# Altium PCB 主控+电源管理拼版_2021-11-10.pcbdoc
Units mm, origin at the board's own origin, x right, y up, seen from the top; angles counter-clockwise.
Board outline 122.05 x 136.4 mm, 2 copper layers (Top Layer, Bottom Layer); 31 components, 73 nets, 166 pads, 76 vias.
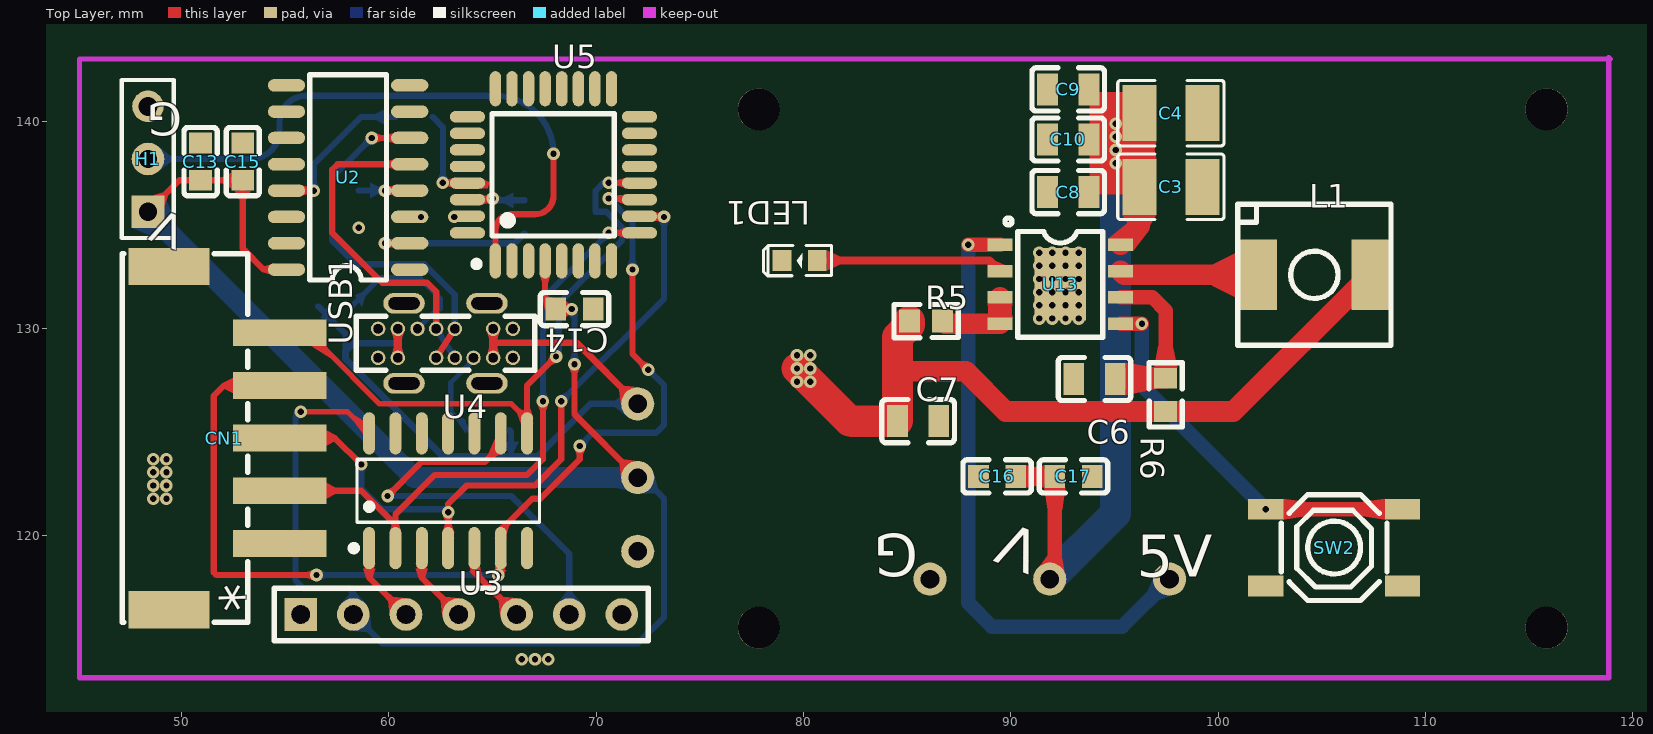
[diagram p0: Top Layer view]
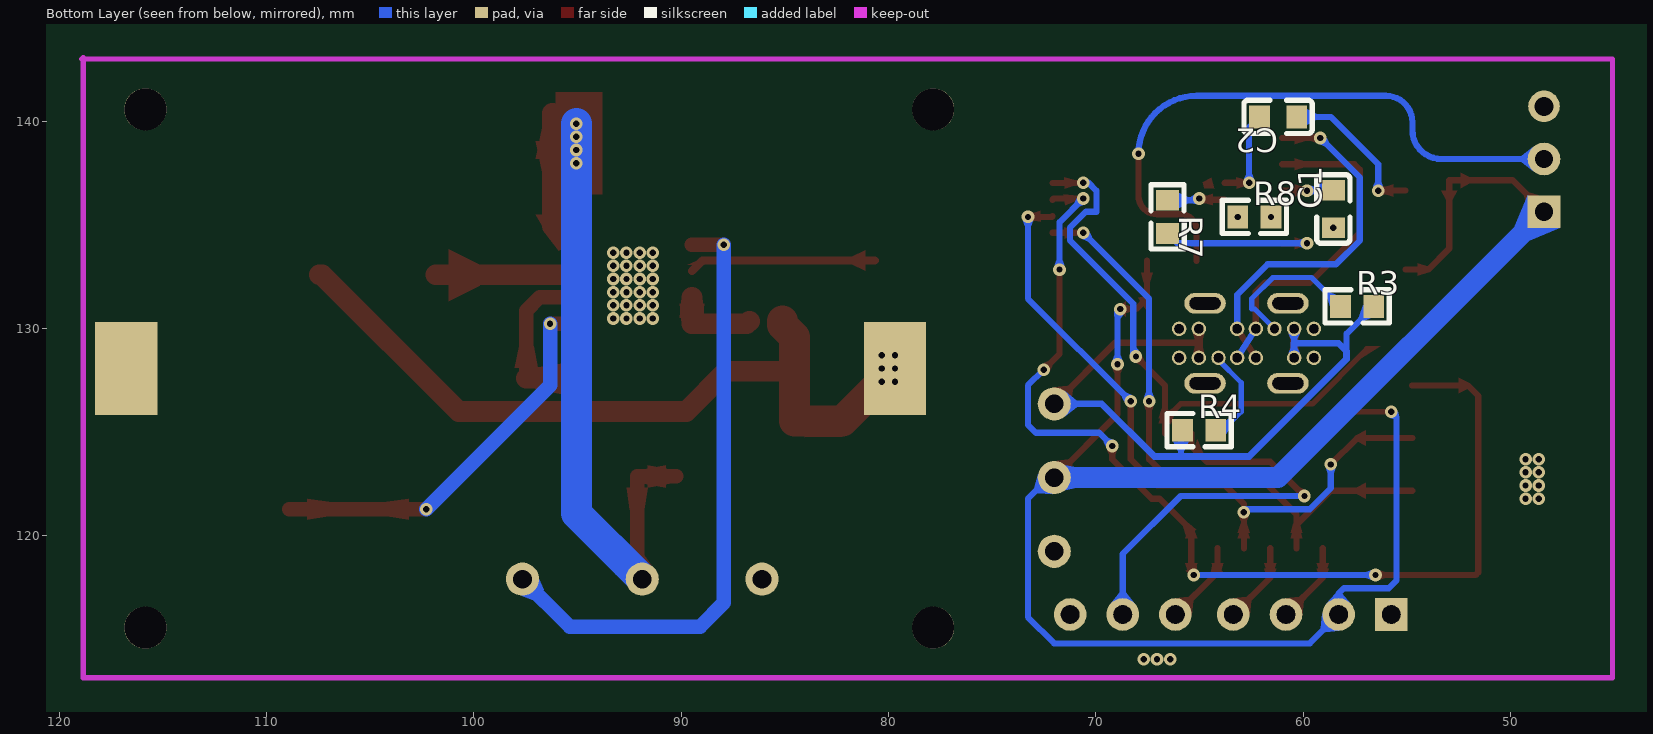
[diagram p1: Bottom Layer view, seen from below]

## Layer stack, top to bottom
Top Layer: signal copper (thickness not stored)
Dielectric: dielectric 0.32, FR-4, Dk 4.8
Bottom Layer: signal copper (thickness not stored)

## Board outline
147.447,25.4 25.4,25.4 25.4,161.798 147.447,161.798

## Components (designator, comment, footprint, x,y, rotation, side; value= is the part's Value field where it differs from the comment)
C1 "103" C0603#1 58.547,135.763 r270 bottom
C2 "0.1u" C0603#1 61.214,140.208 r180 bottom
C3 "100uF" C1210 97.727,136.833 r180 top
C4 "100uF" C1210 97.727,140.389 r180 top
C6 "22uF" C0805 94.044,127.562 r0 top
C7 "22uF" C0805 85.535,125.53 r0 top
C8 "22uF" C0805 92.774,136.579 r180 top
C9 "22uF" C0805 92.774,141.532 r180 top
C10 "22uF" C0805 92.774,139.119 r180 top
C13 "0.1u" C0603#2 50.927,138.049 r270 top
C14 "0.1u" C0603#2 68.961,130.937 r180 top
C15 "0.1u" C0603#2 52.959,138.049 r270 top
C16 "0.1u" C0603#2 89.345,122.863 r0 top
C17 "0.1u" C0603#2 93.028,122.863 r180 top
CN1 "XH2.54-5AB" CONN-SMD_5P-P2.54_XH2.54-5AB 52.07,124.714 r90 top
H1 "HDR-F-2.54_1x3" HDR-F-2.54_1X3 48.387,138.176 r90 top
L1 "1uH" IND-SMD_L7.1-W6.5-P5.60 104.648,132.588 r0 top
LED1 "LED-0603_R" LED0603_RED 79.82,133.277 r180 top
R3 "5k" R0603#1 57.405,131.064 r0 bottom
R4 "5k" R0603#1 65.025,125.095 r0 bottom
R5 "1k" R0603#2 85.916,130.356 r0 top
R6 "0.5R" R0603#2 97.473,126.8 r270 top
R7 "1k" R0603#1 66.548,135.382 r90 bottom
R8 "1k" R0603#1 62.357,135.382 r0 bottom
SW2 "TS-1187A-B-A-B" SW-SMD_4P-L5.1-W5.1-P3.70-LS6.5-TL-2 105.601,119.434 r0 top
U2 "CH340C" SOP-16_L10.0-W3.9-P1.27-LS6.0-BL 58.039,137.287 r90 top
U3 "7P排针" 7P 63.373,116.205 r0 top
U4 "CD74HC14M96" SOIC-14_L8.7-W3.9-P1.27-LS6.0-BL 62.865,122.174 r0 top
U5 "LGT8F328P" QFP-32_L7.0-W7.0-P0.80-LS9.0-BL 67.945,137.414 r0 top
U13 "IP5306" ESOP-8_L4.9-W3.9-P1.27-LS6.0-BL-EP 92.393,132.134 r270 top
USB1 "TYPE-C-31-M-15" USBC-TH_TYPE-C-31-M-15 62.738,129.286 r90 top

## Footprints (in the part's own frame and the unit in brackets; to place one, negate y for a bottom-side part, rotate by r counter-clockwise, add the part's x,y. Pads: shape width x height; smd on the part's side, far side on the other; paste and mask are expansions set on the pad)
7P [mil]
  rect 62x62 hole 35 slot 35.2 at 0 deg: 1(-300,0)
  round 62 hole 35 slot 35.2 at 0 deg: 2(-200,0) 3(-100,0) 4(0,0) 5(110,0) 6(210,0) 7(310,0)
  silkscreen extent -350,-50 360,50
C0603#1 [mm]
  rect 1x1.1 smd: 1(0.9,0) 2(-0.9,0)
  silkscreen extent -1.65,-0.8 1.65,0.8
C0603#2 [mm]
  rect 1x1.1 smd: 1(-0.9,0) 2(0.9,0)
  silkscreen extent -1.65,-0.8 1.65,0.8
C0805 [mm]
  rect 1x1.55 smd: 1(-1,0) 2(1,0)
  silkscreen extent -1.75,-1.04 1.75,1.04
C1210 [mm]
  rect 1.635x2.7 smd: 1(-1.517,0) 2(1.517,0)
  silkscreen extent -2.56,-1.58 2.56,1.58
CONN-SMD_5P-P2.54_XH2.54-5AB [mm]
  rect 1.3x4.5 smd: 1(-5.079,-2.675) 2(-2.54,-2.675) 3(0,-2.675) 4(2.54,-2.675) 5(5.08,-2.675)
  rect 1.8x3.9 smd: 6(-8.28,2.675) 7(8.28,2.675)
  silkscreen extent -8.89,-1.13 8.89,4.93
ESOP-8_L4.9-W3.9-P1.27-LS6.0-BL-EP [mm]
  rect 0.6x1.2 smd: 1(-1.905,-2.908) 2(-0.635,-2.908) 3(0.635,-2.908) 4(1.905,-2.908) 5(1.905,2.908) 6(0.635,2.908) 7(-0.635,2.908) 8(-1.905,2.908)
  rect 3.5x2.5 smd: 9(0,0)
  silkscreen extent -3.2,-2.67 2.55,2.05
HDR-F-2.54_1X3 [mil]
  rect 62x62 hole 35: 1(-100,0)
  round 62 hole 35: 2(0,0)
  round 60 hole 36: 3(100,0)
  silkscreen extent -150,-49 150,50
IND-SMD_L7.1-W6.5-P5.60 [mm]
  rect 2x3.4 smd: 1(-2.8,0) 2(2.8,0)
  silkscreen extent -3.7,-3.4 3.7,3.4
LED0603_RED [mm]
  rect 0.9x1 smd: 1(-0.85,0) 2(0.85,0)
  silkscreen extent -1.54,-0.73 1.75,0.73
QFP-32_L7.0-W7.0-P0.80-LS9.0-BL [mm]
  oval 0.55x1.7 smd: 1(-2.8,-4.15) 2(-2,-4.15) 3(-1.2,-4.15) 4(-0.4,-4.15) 5(0.4,-4.15) 6(1.2,-4.15) 7(2,-4.15) 8(2.8,-4.15) 17(2.8,4.15) 18(2,4.15) 19(1.2,4.15) 20(0.4,4.15) 21(-0.4,4.15) 22(-1.2,4.15) 23(-2,4.15) 24(-2.8,4.15)
  oval 1.7x0.55 smd: 9(4.15,-2.8) 10(4.15,-2) 11(4.15,-1.2) 12(4.15,-0.4) 13(4.15,0.4) 14(4.15,1.2) 15(4.15,2) 16(4.15,2.8) 25(-4.15,2.8) 26(-4.15,2) 27(-4.15,1.2) 28(-4.15,0.4) 29(-4.15,-0.4) 30(-4.15,-1.2) 31(-4.15,-2) 32(-4.15,-2.8)
  silkscreen extent -3.86,-4.45 2.94,2.95
R0603#1 [mm]
  rect 1x1.1 smd: 1(0.8,0) 2(-0.8,0)
  silkscreen extent -1.55,-0.81 1.55,0.8
R0603#2 [mm]
  rect 1x1.1 smd: 1(-0.8,0) 2(0.8,0)
  silkscreen extent -1.55,-0.8 1.55,0.81
SOIC-14_L8.7-W3.9-P1.27-LS6.0-BL [mm]
  oval 0.574x2.038 smd: 1(-3.81,-2.769) 2(-2.54,-2.769) 3(-1.27,-2.769) 4(0,-2.769) 5(1.27,-2.769) 6(2.54,-2.769) 7(3.81,-2.769) 8(3.81,2.769) 9(2.54,2.769) 10(1.27,2.769) 11(0,2.769) 12(-1.27,2.769) 13(-2.54,2.769) 14(-3.81,2.769)
  silkscreen extent -4.7,-2.92 4.4,1.52
SOP-16_L10.0-W3.9-P1.27-LS6.0-BL [mm]
  oval 0.6x1.8 smd: 1(-4.445,-2.972) 2(-3.175,-2.972) 3(-1.905,-2.972) 4(-0.635,-2.972) 5(0.635,-2.972) 6(1.905,-2.972) 7(3.175,-2.972) 8(4.445,-2.972) 9(4.445,2.972) 10(3.175,2.972) 11(1.905,2.972) 12(0.635,2.972) 13(-0.635,2.972) 14(-1.905,2.972) 15(-3.175,2.972) 16(-4.445,2.972)
  silkscreen extent -4.95,-1.85 4.95,1.85
SW-SMD_4P-L5.1-W5.1-P3.70-LS6.5-TL-2 [mm]
  rect 1.7x1 smd: 1(-3.3,1.849) 2(3.3,1.85) 3(-3.3,-1.85) 4(3.3,-1.85)
  silkscreen extent -2.55,-2.55 2.55,2.55
USBC-TH_TYPE-C-31-M-15 [mm]
  round 0.7 hole 0.45 slot 0.455 at 0 deg: 1(0.7,3.25) 2(0.7,2.3) 4(0.7,0.45) 5(0.7,-0.45) 7(0.7,-2.3) 8(0.7,-3.25) 9(-0.7,-3.25) 10(-0.7,-2.3) 11(-0.7,-1.35) 12(-0.7,-0.45) 13(-0.7,0.45) 15(-0.7,2.3) 16(-0.7,3.25)
  round 0.7 hole 0.45: 3(0.7,1.35)
  oval 1x2 hole 0.6 slot 1.5 at 90 deg: 17(-1.93,-2) 17(-1.93,2) 17(1.93,-2) 17(1.93,2)
  silkscreen extent -1.3,-4.3 1.3,4.3

## Free pads (board coordinates)
  round 1.6 hole 0.9: 1(72.009,119.253) 1(72.009,122.809) 1(72.009,126.365) 1(86.107,117.91) 1(91.885,117.91) 1(97.664,117.91)
  rect 3x4.5 smd far side: 1(116.777,128.07) 2(79.693,128.07)
  round 2.032 hole 2.032 unplated: ""(77.851,115.57) ""(77.851,140.57) ""(115.851,115.57) ""(115.851,140.57)

## Via types
v1: diameter 0.61, hole 0.305, Top Layer to Bottom Layer, 76 vias

## Nets (pads, with @x,y where several pads share a name; then routed paths per layer and width w, separated by ;. In a path a pad name is that pad's centre, name@x,y a point inside that pad or via, vN(x,y) a via of type N, cw(c..) or ccw(c..) an arc to the next point about the centre after c; other vN are vias at no path point)
+5V: pad.1@72.009,126.365 pad.1@97.664,117.91 R3.2 R4.1 U13.1 USB1.2 USB1.7 USB1.10 USB1.15 | length 67.4
  Top Layer w0.32: 65.038,129.317 69.057,129.317 pad.1@72.009,126.365
  Top Layer w0.4: USB1.15 USB1.2 ; USB1.10 USB1.7
  Top Layer w0.7: v1(87.948,134.039) U13.1
  Bottom Layer w0.3: R3.2 57.912,129.756 57.912,128.732 ; R4.1 65.893,125.026 65.893,123.825
  Bottom Layer w0.32: USB1.15 60.452,129.286 58.293,129.286 57.912,128.905 57.912,128.524 62.611,123.825 67.183,123.825 69.723,126.365 pad.1@72.009,126.365 ; USB1.15 USB1.2
  Bottom Layer w0.7: v1(87.948,134.039) 87.948,116.767 89.091,115.624 95.378,115.624 pad.1@97.664,117.91
BAT: C7.1 L1.2 pad.2 R5.1 R6.2 | length 37.4
  Top Layer w1: 84.534,127.943 87.821,127.943 89.764,126 R6.2 100.737,126 107.325,132.588 L1.2
  Top Layer w1.5: v1(79.693,128.07) 82.233,125.53 84.534,125.53 84.534,129.594 85.116,130.176 R5.1
  other v1: 79.693,127.435 80.328,127.435 80.328,128.07 79.693,128.705 80.328,128.705
C6_2: C6.2 R6.1 U13.6 | length 8.1
  Top Layer w0.7: U13.6 96.838,131.499 97.473,130.864 R6.1
  Top Layer w1: C6.2 95.083,127.6 R6.1
CN1_6: CN1.6
CN1_7: CN1.7
D0: U3.3 U4.1 | length 3.9
  Top Layer w0.3: U4.1 59.055,117.983 U3.3
D1: U3.4 U4.3 | length 3.9
  Top Layer w0.3: U4.3 61.595,117.983 U3.4
D2: U3.5 U4.5 | length 4
  Top Layer w0.3: U4.5 64.135,118.237 U3.5
D3: U3.6 U4.9 | length 19.9
  Top Layer w0.3: v1(59.944,121.92) 61.595,123.571 64.643,123.571 65.405,124.333 U4.9
  Bottom Layer w0.3: v1(59.944,121.92) 65.913,121.92 68.707,119.126 U3.6
D+: U2.5 USB1.4 USB1.12 | length 16.5
  Top Layer w0.3: U2.5 57.531,137.922 57.277,137.668 57.277,134.62 59.69,132.207 61.849,132.207 62.288,131.768 USB1.4
  Bottom Layer w0.3: USB1.4 USB1.12
D-: U2.6 USB1.5 USB1.13 | length 17.9
  Top Layer w0.3: v1(59.182,139.192) U2.6 ; USB1.13 USB1.5
  Bottom Layer w0.3: v1(59.182,139.192) 57.277,137.287 57.277,134.239 58.42,133.096 61.722,133.096 63.188,131.63 USB1.5
DTR: C2.1 U2.13 | length 7.5
  Top Layer w0.3: U2.13 v1(56.388,136.652)
  Bottom Layer w0.3: v1(56.388,136.652) 56.388,137.922 58.674,140.208 C2.1
GND: C1.1 C3.1 C4.1 C6.1 C7.2 C8.2 C9.2 C10.2 C13.1 C14.1 C15.1 C16.1 C17.1 CN1.1 H1.3 LED1.2 pad.1@72.009,119.253 pad.1@86.107,117.91 pad.1@116.777,128.07 SW2.3 SW2.4 U2.1 U3.1 U4.7 U5.5 U13.9 USB1.1 USB1.8 USB1.9 USB1.16
  other v1: 66.421,114.046 67.056,114.046 67.691,114.046 48.641,121.793 49.276,121.793 48.641,122.428 49.276,122.428 48.641,123.063 49.276,123.063 48.641,123.698 49.276,123.698 91.377,130.483 92.012,130.483 92.647,130.483 93.282,130.483 91.377,131.118 92.012,131.118 92.647,131.118 93.282,131.118 91.377,131.753 92.012,131.753 92.647,131.753 93.282,131.753 91.377,132.388 92.012,132.388 92.647,132.388 93.282,132.388 91.377,133.023 92.012,133.023 92.647,133.023 93.282,133.023 91.377,133.658 92.012,133.658 92.647,133.658 93.282,133.658 58.547,134.863
L0: CN1.2 U4.2 U5.9 | length 30.9
  Top Layer w0.3: CN1.2 58.674,122.174 60.325,120.523 U4.2 60.325,121.031 62.23,122.936 66.675,122.936 67.437,123.698 v1(67.437,126.492) ; v1(70.612,134.62) U5.9
  Bottom Layer w0.3: v1(67.437,126.492) 67.437,131.445 v1(70.612,134.62)
L1: CN1.3 U4.4 U5.10 | length 33.6
  Top Layer w0.3: CN1.3 57.404,124.714 v1(58.674,123.444) ; U4.4 v1(62.865,121.132) ; v1(62.865,121.132) 62.865,121.539 63.754,122.428 67.056,122.428 68.326,123.698 v1(68.326,126.492) ; U5.10 72.126,135.382 v1(73.279,135.382)
  Bottom Layer w0.3: v1(58.674,123.444) 58.674,122.301 59.69,121.285 v1@62.865,121.285 ; v1(68.326,126.492) 73.279,131.445 v1(73.279,135.382)
L1_1: L1.1 U13.7 | length 6.6
  Top Layer w1: U13.7 95.482,132.588 L1.1
L2: CN1.4 U4.6 U5.11 | length 51.8
  Top Layer w0.3: CN1.4 52.07,127.254 51.562,126.746 51.562,118.237 51.689,118.11 v1(56.515,118.11) ; v1(65.278,118.11) 65.405,118.237 U4.6 65.405,120.269 66.929,121.793 67.31,121.793 69.215,123.698 v1(69.215,124.333) ; v1(70.612,136.271) 72.039,136.271 U5.11 ; v1(71.755,132.842) 71.755,128.778 v1(72.517,128.016)
  Bottom Layer w0.3: v1(56.515,118.11) v1(65.278,118.11) ; v1(69.215,124.333) 69.85,124.968 72.898,124.968 73.279,125.349 73.279,127.254 v1(72.517,128.016) ; v1(70.612,136.271) 71.755,135.128 v1(71.755,132.842)
L3: CN1.5 U4.8 U5.12 | length 28.6
  Top Layer w0.254: 56.896,129.032 59.563,126.365 65.913,126.365 66.675,125.603 U4.8
  Top Layer w0.3: U4.8 66.675,127.254 v1(68.072,128.651) ; v1(70.612,137.033) U5.12
  Bottom Layer w0.3: v1(68.072,128.651) 68.199,128.778 68.199,131.191 71.247,134.239 71.247,134.874 70.485,135.636 70.376,135.636 69.977,135.636 69.977,136.652 70.358,137.033 v1(70.612,137.033)
LD: H1.2 U5.1 | length 30.3
  Top Layer w0.3: U5.1 ccw(c65.145,133.27) 65.151,133.27 65.151,134.747 cw(c65.913,134.747) 65.913,135.509 67.056,135.509 ccw(c67.056,136.398) 67.945,136.398 v1(67.945,138.43)
  Bottom Layer w0.3: H1.2 53.34,138.176 ccw(c53.34,139.573) 54.737,139.573 54.737,139.954 cw(c56.007,139.954) 56.007,141.224 65.151,141.224 cw(c65.151,138.43) v1(67.945,138.43)
LED1_1: LED1.1 U13.2 | length 9
  Top Layer w0.4: LED1.1 88.977,133.277 U13.2
MD: U5.13
R5_2: R5.2 U13.3 U13.4 | length 4.1
  Top Layer w1: R5.2 86.843,130.229 U13.4 U13.3
RX: R7.1 U5.30 | length 2.8
  Top Layer w0.3: U5.30 64.968,136.215 v1(65.024,136.271)
  Bottom Layer w0.3: v1(65.024,136.271) 65.113,136.182 R7.1
S$332: 
S$334: 
S$1421: 
S$4223: 
S$4225: 
S$4289: 
SW: SW2.1 SW2.2 U13.5 | length 19
  Top Layer w0.7: U13.5 v1(96.33,130.229) ; v1(102.301,121.283) SW2.2@108.901,121.283
  Bottom Layer w0.7: v1(96.33,130.229) 96.33,127.254 v1(102.301,121.283)
TX: R8.1 U5.31
  other v1: 63.157,135.382
U2_2: R7.2 U2.2 | length 8.1
  Top Layer w0.3: v1(59.817,134.112) U2.2
  Bottom Layer w0.3: v1(59.817,134.112) 66.078,134.112 R7.2
U2_3: R8.2 U2.3
  other v1: 61.557,135.382
U2_4: C1.2 U2.4 | length 2.5
  Top Layer w0.3: v1(59.817,136.652) U2.4
  Bottom Layer w0.3: C1.2 v1(59.817,136.652)
U2_7: U2.7
U2_8: U2.8
U2_9: U2.9
U2_10: U2.10
U2_11: U2.11
U2_12: U2.12
U2_14: U2.14
U2_15: U2.15
U3_7: U3.7
U4_10: U4.10
U4_11: U4.11
U4_12: U4.12
U4_13: U4.13
U5_2: U5.2
U5_3: U5.3
U5_6: U5.6
U5_7: U5.7
U5_8: U5.8
U5_14: U5.14
U5_15: U5.15
U5_16: U5.16
U5_17: U5.17
U5_18: U5.18
U5_19: U5.19
U5_20: U5.20
U5_21: U5.21
U5_22: U5.22
U5_23: U5.23
U5_24: U5.24
U5_25: U5.25
U5_26: U5.26
U5_27: U5.27
U5_28: U5.28
U5_29: C2.2 U5.29 | length 4.6
  Top Layer w0.3: v1(62.611,137.033) 63.777,137.033 U5.29
  Bottom Layer w0.3: C2.2 62.611,139.71 v1(62.611,137.033)
U5_32: U5.32
USB1_3: R3.1 USB1.3 | length 7.3
  Bottom Layer w0.254: R3.1 59.601,132.461 61.468,132.461 62.484,131.445 62.484,130.937 62.339,130.937 USB1.3
USB1_11: R4.2 USB1.11 | length 4.7
  Bottom Layer w0.254: USB1.11@64.087,128.585 64.087,128.476 62.992,127.381 62.992,125.984 63.881,125.095 R4.2
USB1_17: USB1.17
VCC: C3.2 C4.2 C8.1 C9.1 C10.1 C13.2 C14.2 C15.2 C16.2 C17.2 H1.1 pad.1@72.009,122.809 pad.1@91.885,117.91 U2.16 U3.2 U4.14 U5.4 U13.8 | length 129.2
  Top Layer w0.254: v1(55.753,125.984) 58.014,125.984 U4.14
  Top Layer w0.3: H1.1 49.901,137.15 C15.2 52.959,133.858 53.975,132.842 U2.16 ; U5.4@67.544,133.264 67.544,131.453 C14.2 v1(68.834,130.937) ; v1(68.961,128.27) 68.961,125.857 pad.1@72.009,122.809
  Top Layer w0.7: C16.2@90.244,122.863 C17.2 92.129,118.154 pad.1@91.885,117.91
  Top Layer w1: U13.8 96.211,134.948 C3.2 C4.2
  Bottom Layer w0.3: v1(55.753,125.984) 55.499,125.73 55.499,117.856 55.88,117.475 58.039,117.475 58.293,117.221 U3.2 59.69,114.808 72.009,114.808 73.279,116.078 73.279,121.793 72.263,122.809 pad.1@72.009,122.809 ; v1(68.834,130.937) 68.961,130.81 v1(68.961,128.27)
  Bottom Layer w1: H1.1 61.214,122.809 pad.1@72.009,122.809
  Bottom Layer w1.5: pad.1@91.885,117.91 95.06,121.085 v1(95.06,139.881)
  other v1: 95.06,137.976 95.06,138.611 95.06,139.246

## Polygon pours and split planes (outlines as drawn)
GND on Bottom Layer (solid): 40.132,147.32 127.381,147.32 128.016,146.685 128.016,115.57 128.905,114.681 128.905,109.855 125.857,106.807 38.989,106.807 38.735,106.553
GND on Top Layer (solid): 38.1,149.098 133.096,149.098 134.747,147.447 134.747,105.41 133.223,103.886 39.624,103.886 38.1,105.41

## Other copper
Top Layer:
  region net VCC: 92.628,122.313 91.628,122.313 91.778,121.263 92.478,121.263
  region net VCC: 91.418,118.56 92.588,118.292 92.478,118.892 91.778,119.052
  region net VCC: 90.745,123.413 90.745,122.313 91.795,122.513 91.795,123.213
  region net VCC: 91.628,122.313 91.628,123.413 90.578,123.213 90.578,122.513
  region net SW: 103.151,121.783 103.151,120.783 104.201,120.934 104.201,121.634
  region net SW: 108.051,120.785 108.051,121.785 107.001,121.634 107.001,120.934
  region net LED1_1: 88.885,133.069 89.685,133.069 89.26,133.277 88.835,133.136
  region net LED1_1: 81.12,133.777 81.12,132.777 81.72,133.077 81.72,133.477
  region net C6_2: 96.923,128.1 98.023,128.1 97.823,129.15 97.123,129.15
  region net C6_2: 95.544,128.337 95.544,126.787 97.044,127.1 97.044,128.1
  region net C6_2: 96.923,127.1 96.923,128.1 95.423,128.1 95.423,127.1
  region net BAT: 96.923,125.5 96.923,126.5 95.423,126.5 95.423,125.5
  region net BAT: 98.023,126.5 98.023,125.5 99.523,125.5 99.523,126.5
  region net VCC: 95.392,138.183 97.027,138.183 96.71,139.683 95.71,139.683
  region net VCC: 97.027,139.039 95.392,139.039 95.71,137.539 96.71,137.539
  region net VCC: 94.701,134.339 95.901,133.739 96.563,134.594 95.738,135.183
  region net VCC: 97.027,135.483 95.392,135.483 95.71,134.947 96.71,134.947
  region net L1_1: 101.219,131.318 101.219,133.818 99.719,133.068 99.719,132.068
  region net R5_2: 90.085,131.199 88.885,131.199 88.985,130.229 89.985,130.229
  region net R5_2: 88.885,130.529 90.085,130.529 89.985,131.499 88.985,131.499
  region net BAT: 84.035,124.755 84.035,126.305 82.233,126.28 82.233,124.78
  region net VCC: 58.768,124.913 58.768,125.548 58.387,125.791 58.387,125.431
  region net L3: 66.388,125.378 66.642,125.96 66.305,126.153 66.197,125.901
  region net D3: 65.34,123.932 65.118,124.648 64.834,123.974 64.924,123.64
  region net D3: 60.248,121.901 59.925,122.224 60.131,122.319 60.343,122.107
  region net L3: 66.962,125.675 66.388,125.675 66.525,126.125 66.825,126.125
  region net L3: 68.091,128.347 67.768,128.67 67.673,128.464 67.885,128.252
  region net L2: 65.692,118.673 65.118,118.673 65.255,118.237 65.555,118.237
  region net L2: 65.122,118.372 65.557,118.232 65.555,118.457 65.255,118.553
  region net L2: 65.646,119.98 65.164,120.293 65.522,120.598 65.779,120.431
  region net L2: 68.986,124.131 69.444,124.131 69.365,123.918 69.065,123.918
  region net D2: 64.422,118.673 63.848,118.673 63.985,118.237 64.285,118.237
  region net D2: 65.381,116.156 66.216,116.991 65.515,117.069 65.303,116.857
  region net L1: 63.152,120.137 62.578,120.137 62.715,120.587 63.015,120.587
  region net L1: 62.636,120.93 63.094,120.93 63.015,120.717 62.715,120.717
  region net D1: 61.882,118.673 61.308,118.673 61.445,118.223 61.745,118.223
  region net D1: 62.587,116.156 63.422,116.991 62.721,117.069 62.509,116.857
  region net L0: 60.612,120.137 60.038,120.137 60.175,120.523 60.475,120.523
  region net L0: 56.995,122.549 56.995,121.799 57.445,122.024 57.445,122.324
  region net L0: 60.612,120.137 60.038,120.137 60.175,120.587 60.475,120.587
  region net L0: 67.208,126.29 67.666,126.29 67.587,126.077 67.287,126.077
  region net D0: 59.342,118.673 58.768,118.673 58.905,118.223 59.205,118.223
  region net D0: 60.047,116.156 60.882,116.991 60.181,117.069 59.969,116.857
  region net L3: 68.091,128.347 67.768,128.67 67.673,128.464 67.885,128.252
  region net L3: 66.962,125.421 66.388,125.421 66.525,125.871 66.825,125.871
  region net L2: 65.122,118.372 65.557,118.232 65.555,118.457 65.255,118.553
  region net L2: 65.67,118.31 65.14,118.528 65.128,118.172 65.428,118.048
  region net L2: 68.986,124.131 69.444,124.131 69.365,123.918 69.065,123.918
  region net L2: 65.692,119.883 65.118,119.883 65.255,120.269 65.555,120.269
  region net D2: 65.381,116.156 66.216,116.991 65.515,117.069 65.303,116.857
  region net D2: 64.387,118.555 63.883,118.282 64.211,117.949 64.487,118.097
  region net L1: 62.636,120.93 63.094,120.93 63.015,120.717 62.715,120.717
  region net L1: 63.152,119.883 62.578,119.883 62.715,120.333 63.015,120.333
  region net D1: 62.587,116.156 63.422,116.991 62.721,117.069 62.509,116.857
  region net D1: 61.882,118.419 61.308,118.419 61.445,117.983 61.745,117.983
  region net L0: 56.995,122.549 56.995,121.799 57.445,122.024 57.445,122.324
  region net L0: 60.612,119.883 60.038,119.883 60.175,120.333 60.475,120.333
  region net L0: 67.208,126.29 67.666,126.29 67.587,126.077 67.287,126.077
  region net L0: 60.612,119.883 60.038,119.883 60.175,120.333 60.475,120.333
  region net D0: 60.047,116.156 60.882,116.991 60.181,117.069 59.969,116.857
  region net D0: 59.342,118.419 58.768,118.419 58.905,117.983 59.205,117.983
  region net L3: 56.995,129.145 56.281,129.145 57.277,128.524 57.404,128.651
  region net L2: 56.313,117.881 56.313,118.339 56.1,118.26 56.1,117.96
  region net L2: 52.495,126.879 52.495,127.629 52.07,127.404 52.07,127.104
  region net L1: 56.995,125.089 56.995,124.339 57.404,124.564 57.404,124.864
  region net VCC: 54.467,132.542 54.467,133.142 54.017,132.992 54.017,132.692
  region net VCC: 53.334,136.649 52.584,136.649 52.809,136.199 53.109,136.199
  region net VCC: 48.644,136.423 49.174,135.893 49.334,136.37 49.121,136.583
  region net VCC: 52.409,136.774 52.409,137.524 51.959,137.299 51.959,136.999
  region net U5_29: 63.232,137.289 63.208,136.739 62.764,136.883 62.777,137.183
  region net U5_29: 64.436,137.281 64.304,136.747 64.77,136.756 64.844,137.056
  region net DTR: 56.186,136.423 56.186,136.881 55.973,136.802 55.973,136.502
  region net DTR: 55.667,136.352 55.667,136.952 56.117,136.802 56.117,136.502
  region net L2: 72.536,128.32 72.213,127.997 72.118,128.203 72.33,128.415
  region net L1: 72.69,135.688 72.651,135.14 73.108,135.232 73.13,135.532
  region net L1: 73.077,135.153 73.077,135.611 72.864,135.532 72.864,135.232
  region net L3: 71.532,137.289 71.508,136.739 71.064,136.883 71.077,137.183
  region net L2: 71.555,136.487 71.485,135.941 71.055,136.121 71.093,136.421
  region net L0: 71.524,134.889 71.516,134.339 71.068,134.47 71.072,134.77
  region net VCC: 68.732,128.068 69.19,128.068 69.111,127.855 68.811,127.855
  region net VCC: 71.211,122.759 72.059,123.607 71.345,123.685 71.133,123.473
  region net VCC: 68.561,131.312 68.561,130.562 68.834,130.787 68.834,131.087
  region net VCC: 68.632,130.708 68.632,131.166 68.419,131.087 68.419,130.787
  region net VCC: 67.82,132.689 67.27,132.689 67.395,132.239 67.695,132.239
  region net VCC: 67.561,130.849 67.956,131.487 67.651,131.559 67.464,131.322
  region net +5V: 71.211,126.315 72.059,127.163 71.352,127.248 71.126,127.022
  region net +5V: 65.301,128.817 64.776,128.817 64.838,129.062 65.238,129.062
  region net +5V: 65.301,129.754 64.776,129.754 64.838,129.509 65.238,129.509
  region net D+: 60.411,137.622 60.411,138.222 59.961,138.072 59.961,137.772
  region net +5V: 60.7,128.817 60.175,128.817 60.238,129.062 60.638,129.062
  region net +5V: 60.7,129.754 60.175,129.754 60.238,129.509 60.638,129.509
  region net D-: 59.384,138.963 59.384,139.421 59.597,139.342 59.597,139.042
  region net D-: 60.411,138.892 60.411,139.492 59.961,139.342 59.961,139.042
  region net U2_4: 60.411,136.352 60.411,136.952 59.961,136.802 59.961,136.502
  region net RX: 64.37,135.939 64.37,136.489 64.82,136.364 64.82,136.064
  region net RX: 64.856,136.017 64.793,136.47 64.592,136.364 64.634,136.064
  region net U2_2: 60.411,133.812 60.411,134.412 59.961,134.262 59.961,133.962
  rectangle net VCC: 93.79,136.452 96.076,141.405
Bottom Layer:
  region net +5V: 96.865,117.96 97.714,117.112 97.141,116.892 96.646,117.387
  region net VCC: 91.835,118.709 92.683,117.86 93.185,118.15 92.125,119.211
  region net VCC: 58.884,116.726 57.702,116.726 58.143,117.221 58.443,117.221
  region net VCC: 55.772,125.68 55.449,126.003 55.393,125.836 55.605,125.624
  region net L2: 56.717,117.881 56.717,118.339 56.93,118.26 56.93,117.96
  region net L1: 58.445,123.242 58.903,123.242 58.824,123.029 58.524,123.029
  region net VCC: 72.788,122.99 72.091,122.013 72.807,122.053 72.984,122.3
  region net VCC: 58.244,115.419 59.079,116.254 59.157,115.553 58.945,115.341
  region net LD: 48.908,137.585 48.908,138.767 49.459,138.326 49.459,138.026
  region net +5V: 65.517,124.545 66.267,124.545 66.042,124.095 65.742,124.095
  region net +5V: 57.104,131.152 56.71,130.514 57.125,130.331 57.287,130.593
  region net U5_29: 62.382,137.235 62.84,137.235 62.761,137.448 62.461,137.448
  region net DTR: 59.814,140.583 59.814,139.833 59.364,140.058 59.364,140.358
  region net DTR: 56.159,136.854 56.617,136.854 56.538,137.067 56.238,137.067
  region net L3: 67.916,128.913 68.351,128.773 68.349,128.998 68.049,129.094
  region net D3: 69.298,116.726 68.116,116.726 68.557,117.277 68.857,117.277
  region net L2: 70.916,136.29 70.593,135.967 70.799,135.872 71.011,136.084
  region net L2: 71.526,133.044 71.984,133.044 71.905,133.257 71.605,133.257
  region net L2: 69.519,124.314 69.196,124.637 69.402,124.732 69.614,124.52
  region net L0: 70.631,134.316 70.308,134.639 70.213,134.433 70.425,134.221
  region net L0: 67.208,126.694 67.666,126.694 67.587,126.907 67.287,126.907
  region net L1: 73.05,135.18 73.508,135.18 73.429,134.967 73.129,134.967
  region net L1: 68.63,126.473 68.307,126.796 68.513,126.891 68.725,126.679
  region net VCC: 68.732,128.472 69.19,128.472 69.111,128.685 68.811,128.685
  region net VCC: 68.678,130.675 69.113,130.815 69.111,130.59 68.811,130.494
  region net VCC: 49.174,136.423 47.6,134.849 49.094,134.222 49.801,134.929
  region net VCC: 71.48,122.209 71.48,123.409 70.92,123.309 70.92,122.309
  region net +5V: 71.48,125.765 71.48,126.965 70.92,126.525 70.92,126.205
  region net +5V: 60.7,129.754 60.175,129.754 60.278,129.509 60.598,129.509
  region net +5V: 60.7,128.817 60.175,128.817 60.278,129.062 60.598,129.062
  region net +5V: 60.707,128.81 60.182,128.825 60.292,129.067 60.612,129.057
  region net USB1_3: 58.392,131.614 58.704,131.061 58.867,131.547 58.737,131.777
  region net D-: 59.201,138.888 58.878,139.211 58.783,139.005 58.995,138.793
  region net USB1_11: 63.724,125.57 63.724,124.935 63.343,125.453 63.343,125.813
  region net U2_4: 59.622,136.886 59.609,136.429 59.398,136.513 59.406,136.813
  region net U2_4: 59.097,136.288 59.097,137.038 59.547,136.813 59.547,136.513
  region net RX: 65.998,136.557 65.998,135.807 65.548,136.032 65.548,136.332
  region net RX: 65.27,136.451 65.172,136.004 65.396,136.032 65.462,136.332
  region net U2_2: 60.019,133.883 60.019,134.341 60.232,134.262 60.232,133.962

## Silkscreen, mask and mechanical layers (free items; w line width, h text height)
Top Overlay:
  text "G" at 50.038,140.881 h1.6 r180
  text "V" at 50.325,135.24 h1.6 r159
  text "G" at 85.535,120.069 h2.03 r180
  text "V" at 91.614,120.002 h2.03 r159
  text "5V" at 96.076,118.037 h2.03
Mechanical 1:
  lines w0.254 net S$4289: 74.295,49.002 74.295,143.002
  text "V-CUT" at 76.2,143.764 h2.03 r90
  text "V-CUT" at 77.089,38.1 h2.03 r90

## Text inside footprints (layer, text, board x,y; h text height)
CN1: Top Overlay "*" at 52.317,118.6 h2.03 r211